# EAGLE board AMP 1.0 BOARD2 (EAGLE 6.5.0)
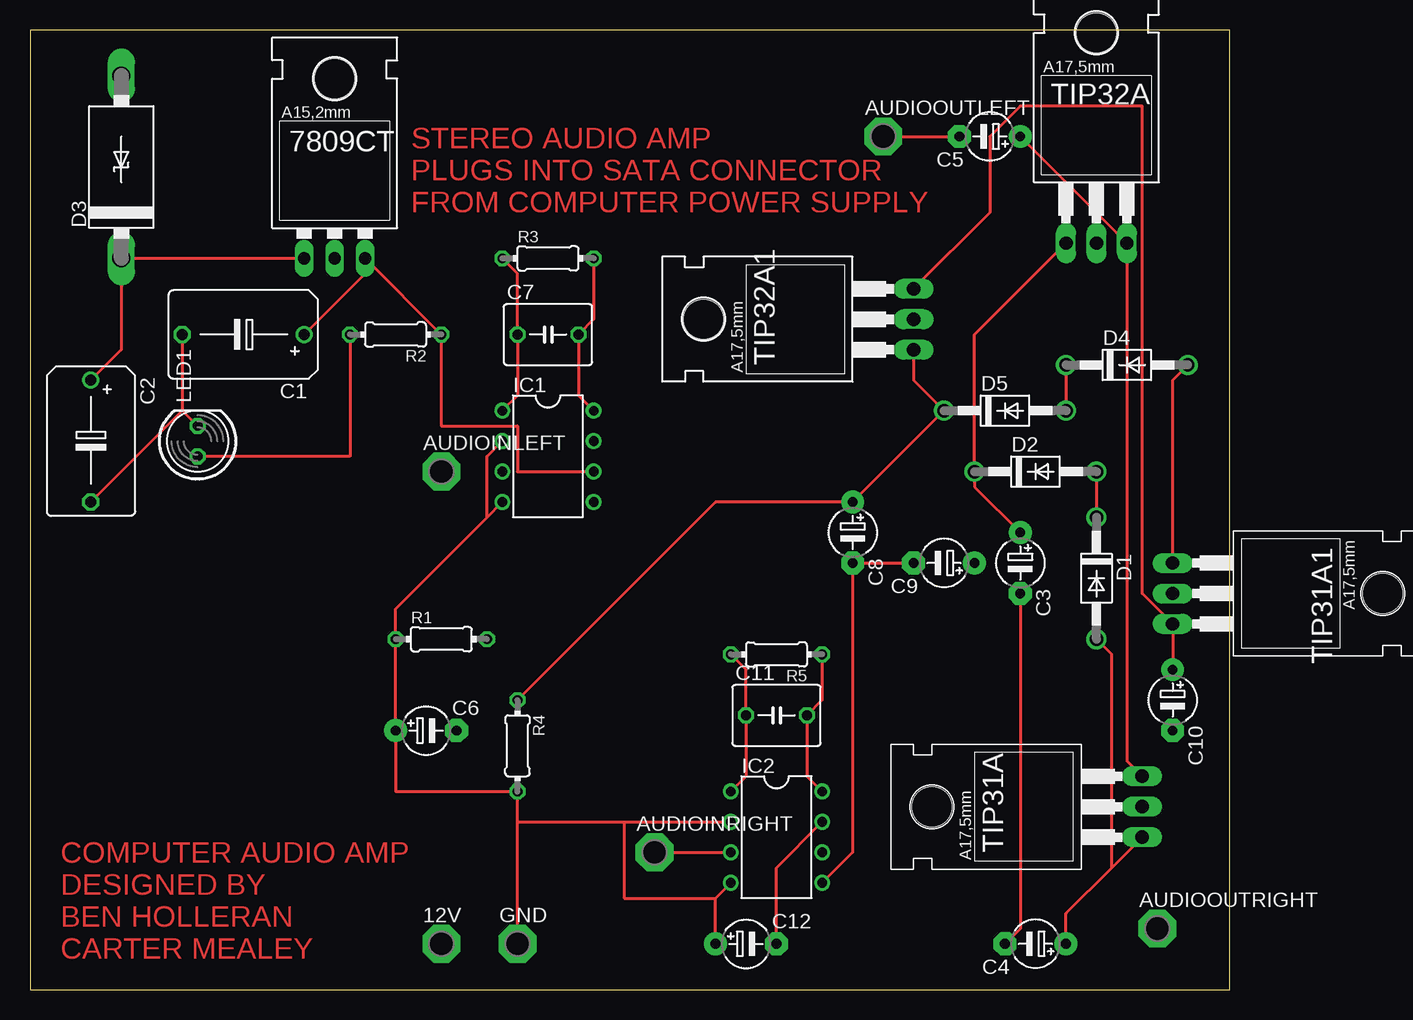
[diagram p0: board, top side]
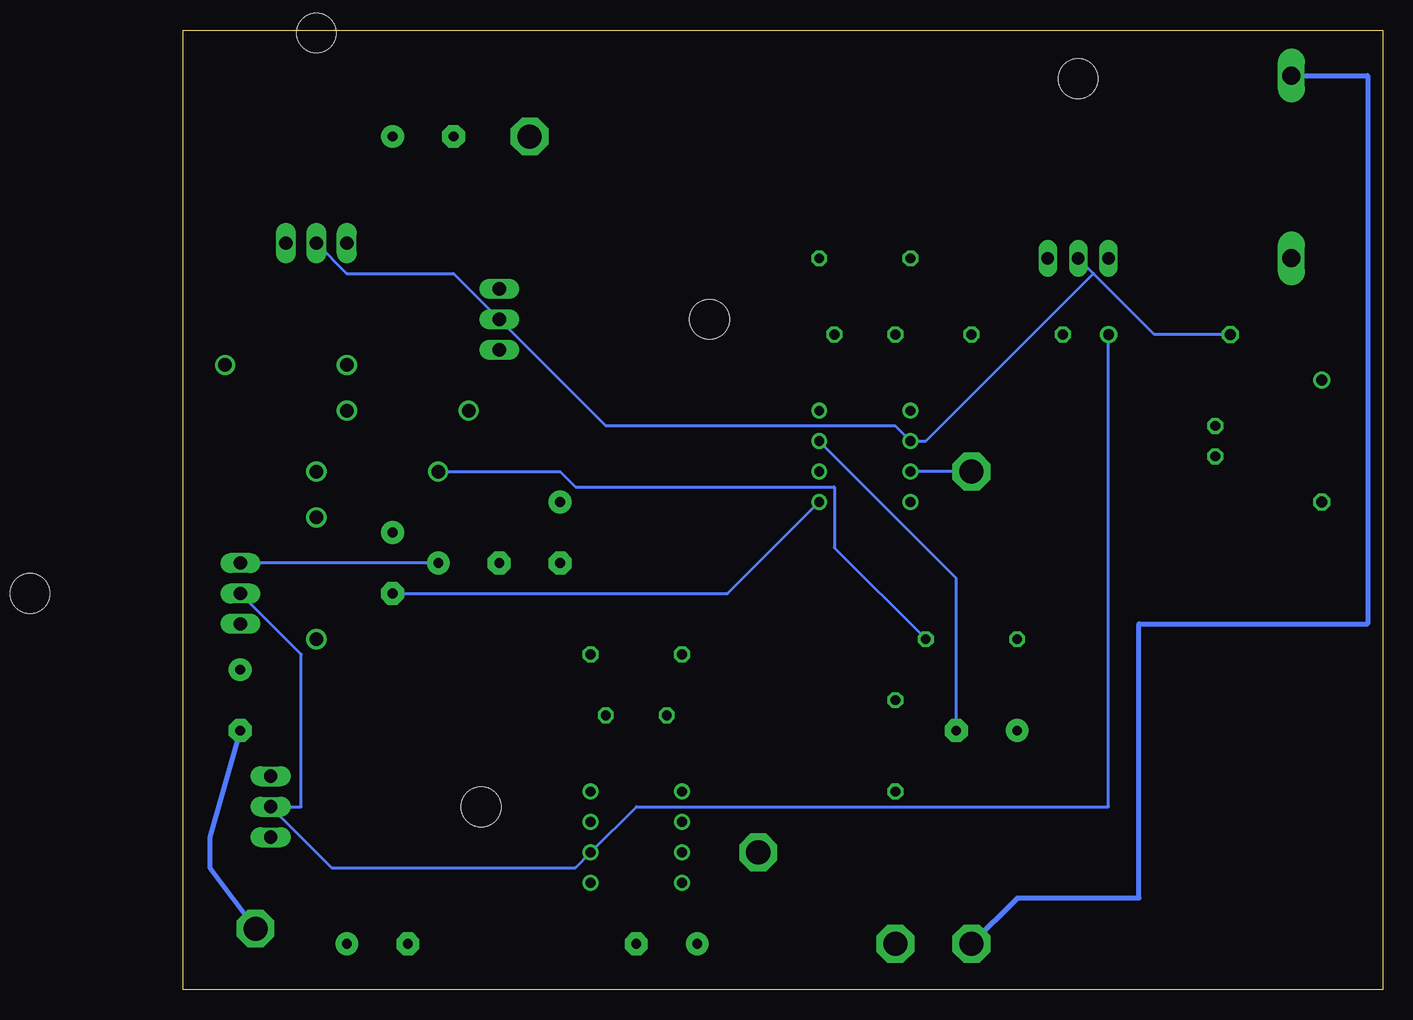
[diagram p1: board, bottom side, seen from below]

Size 100 x 80 mm. Coordinates in mm from the lower left corner, seen from the top.
Outline: 0,0 100,0 100,80 0,80 0,0
Copper layers (1*16): Top 0.035mm / dielectric 1.5mm / Bottom 0.035mm
Design rules "default": minimum track width 10mil, minimum drill 24mil, track to track 8mil, track to pad 8mil, pad to pad 8mil, via to via 8mil, smd to smd 8mil, copper to edge 40mil, drill to drill 8mil, minimum pad ring 10mil, minimum via ring 8mil, stop-mask expansion 4mil, vias tented up to drill 0mil, thermal gap 10mil

## Footprints (pad centres in the part's own frame; a part is rotated, then mirrored left to right if it is on the bottom)
P1-20 = drill 2.007 pad 3.15 octagon: TP 0,0
78XXL = drill 1.016 long: GND 0,-3.81; IN -2.54,-3.81; OUT 2.54,-3.81 | hole 3.302: 0,11.176
B45181C = drill 0.914: + -5.08,0 | drill 0.914 octagon: - 5.08,0
E5-4 = drill 0.813 pad 1.905: + -2.54,0 | drill 0.813 pad 1.905 octagon: - 2.54,0
C050-050X075 = drill 0.813 octagon: 1 -2.54,0; 2 2.54,0
DO41-10 = drill 1.118: A 5.08,0; C -5.08,0
C4111-15 = drill 1.499 long: A 7.62,0; C -7.62,0
DIL08 = drill 0.813 pad 1.27: 1 -3.81,-3.81; 2 -1.27,-3.81; 3 1.27,-3.81; 4 3.81,-3.81; 5 3.81,3.81; 6 1.27,3.81; 7 -1.27,3.81; 8 -3.81,3.81
LED5MM = drill 0.813 octagon: A -1.27,0; K 1.27,0
0204/7 = drill 0.813 octagon: 1 -3.81,0; 2 3.81,0
TO220 = drill 1.118 long: 1 -2.54,-6.35; 2 0,-6.35; 3 2.54,-6.35 | hole 3.302: 0,11.176

## Placement (x,y rotation side)
12V  TPSQPAD1-20  [P1-20]  34.29,3.81 0 top
7809CT  9V out  [78XXL]  25.4,64.77 0 top
AUDIOINLEFT  TPSQPAD1-20  [P1-20]  34.29,43.18 0 top
AUDIOINRIGHT  TPSQPAD1-20  [P1-20]  52.07,11.43 0 top
AUDIOOUTLEFT  TPSQPAD1-20  [P1-20]  71.12,71.12 0 top
AUDIOOUTRIGHT  TPSQPAD1-20  [P1-20]  93.98,5.08 0 top
C1  220uF  [B45181C]  17.78,54.61 180 top
C2  220uF  [B45181C]  5.08,45.72 270 top
C3  47uF  [E5-4]  82.55,35.56 270 top
C4  47uF  [E5-4]  83.82,3.81 180 top
C5  470uF  [E5-4]  80.01,71.12 180 top
C6  6.8Uf  [E5-4]  33.02,21.59 0 top
C7  820pF  [C050-050X075]  43.18,54.61 0 top
C8  47uF  [E5-4]  68.58,38.1 270 top
C9  47uF  [E5-4]  76.2,35.56 180 top
C10  470uF  [E5-4]  95.25,24.13 270 top
C11  820pF  [C050-050X075]  62.23,22.86 0 top
C12  6.8Uf  [E5-4]  59.69,3.81 0 top
D1  1N4004  [DO41-10]  88.9,34.29 270 top
D2  1N4004  [DO41-10]  83.82,43.18 0 top
D3  1N5908  [C4111-15]  7.62,68.58 90 top
D4  1N4004  [DO41-10]  91.44,52.07 0 top
D5  1N4004  [DO41-10]  81.28,48.26 0 top
GND  TPSQPAD1-20  [P1-20]  40.64,3.81 0 top
IC1  LM386N-1  [DIL08]  43.18,44.45 270 top
IC2  LM386N-1  [DIL08]  62.23,12.7 270 top
LED1  [LED5MM]  13.97,45.72 90 top
R1  10K  [0204/7]  34.29,29.21 0 top
R2  1K  [0204/7]  30.48,54.61 180 top
R3  1.1K  [0204/7]  43.18,60.96 0 top
R4  10K  [0204/7]  40.64,20.32 270 top
R5  1.1K  [0204/7]  62.23,27.94 180 top
TIP31A  TIP31C  [TO220]  86.36,15.24 90 top
TIP31A1  TIP31C  [TO220]  101.6,33.02 270 top
TIP32A  TIP30  [TO220]  88.9,68.58 0 top
TIP32A1  TIP30  [TO220]  67.31,55.88 90 top

## Library data of the parts
12V AUDIOINLEFT AUDIOINRIGHT AUDIOOUTLEFT AUDIOOUTRIGHT GND = testpad
7809CT = v-reg
C1-C12 R1-R5 = rcl
D1-D5 = diode
IC1 IC2 = linear
LED1 = led
TIP31A TIP31A1 = transistor-npn
TIP32A TIP32A1 = transistor-pnp

## Nets
N$1: D1.C D2.A
N$2: C3.+ D2.C R1.2 TIP32A.1
N$3: C4.+ D1.A TIP31A.1
N$4: C5.+ TIP31A.3 TIP32A.3
N$5: AUDIOOUTLEFT.TP C5.-
N$6: 7809CT.IN C2.+ D3.C
N$7: AUDIOINLEFT.TP IC1.3
N$8: 7809CT.OUT C1.+ IC1.6 IC2.6 R2.1 TIP31A1.2 TIP31A.2
N$9: C3.- C4.- IC1.5
N$10: LED1.A R2.2
N$11: 12V.TP D3.A
N$12: C6.- IC1.7
N$13: C7.2 IC1.8 R3.2
N$14: AUDIOINRIGHT.TP IC2.3
N$15: C7.1 IC1.1 R3.1
N$16: C10.+ TIP31A1.3 TIP32A1.3
N$17: C8.+ D5.C R4.1 TIP32A1.1
N$18: C9.+ D4.A TIP31A1.1
N$19: D4.C D5.A
N$20: AUDIOOUTRIGHT.TP C10.-
N$21: C8.- C9.- IC2.5
N$23: 7809CT.GND C1.- C2.- C6.+ C12.+ GND.TP IC1.2 IC1.4 IC2.2 IC2.4 LED1.K R1.1 R4.2 TIP32A1.2 TIP32A.2
N$25: C11.2 IC2.8 R5.1
N$26: C11.1 IC2.1 R5.2
N$27: C12.- IC2.7

## Tracks (layer width: path | path; a pad name or v marks a point on that pad's centre or on a via)
N$1
  Top 0.254: D2.A D1.C
N$2
  Top 0.254: TIP32A.1 78.74,54.61 D2.C 78.74,41.91 C3.+
  Bottom 0.254: R1.2 45.72,36.83 45.72,41.91 67.31,41.91 68.58,43.18 D2.C
N$3
  Top 0.254: 90.17,10.16 86.36,6.35 C4.+ | 90.17,10.16 TIP31A.1 | D1.A 90.17,27.94 90.17,10.16
N$4
  Top 0.254: TIP31A.3 91.44,19.05 TIP32A.3 C5.+
N$5
  Top 0.254: AUDIOOUTLEFT.TP C5.-
N$6
  Top 0.254: C2.+ 7.62,53.34 D3.C 7809CT.IN
N$7
  Bottom 0.254: AUDIOINLEFT.TP IC1.3
N$8
  Top 0.254: IC1.6 40.64,43.18 40.64,46.99 34.29,46.99 R2.1 7809CT.OUT 27.94,59.69 C1.+
  Bottom 0.254: TIP31A1.2 90.17,27.94 90.17,15.24 TIP31A.2 87.63,10.16 67.31,10.16 IC2.6 62.23,15.24 22.86,15.24 C1.+
N$9
  Top 0.254: C4.- 82.55,5.08 C3.-
  Bottom 0.254: IC1.5 54.61,33.02 C3.-
N$10
  Top 0.254: LED1.A 26.67,44.45 R2.2
N$11
  Bottom 0.406: D3.A 1.27,76.2 1.27,30.48 20.32,30.48 20.32,7.62 30.48,7.62 12V.TP
N$12
  Bottom 0.254: IC1.7 35.56,34.29 C6.-
N$13
  Top 0.254: R3.2 46.99,55.88 C7.2 45.72,49.53 IC1.8
N$14
  Top 0.254: AUDIOINRIGHT.TP IC2.3
N$15
  Top 0.254: IC1.1 40.64,49.53 C7.1 40.64,59.69 R3.1
N$16
  Top 0.254: TIP32A1.3 80.01,64.77 80.01,71.12 82.55,73.66 92.71,73.66 92.71,33.02 TIP31A1.3 C10.+
  Bottom 0.406: 96.52,30.48 TIP31A1.3
N$17
  Top 0.254: TIP32A1.1 73.66,50.8 D5.C C8.+ 57.15,40.64 R4.1
N$18
  Top 0.254: D4.A 95.25,50.8 TIP31A1.1
  Bottom 0.254: C9.+ TIP31A1.1
N$19
  Top 0.254: D4.C D5.A
N$20
  Bottom 0.406: C10.- 97.79,12.7 97.79,10.16 AUDIOOUTRIGHT.TP
N$21
  Top 0.254: IC2.5 68.58,11.43 C8.- C9.-
N$23
  Top 0.254: 12.7,48.26 LED1.K | C1.- 12.7,48.26 | 12.7,48.26 C2.- | 57.15,7.62 IC2.4 | C12.+ 57.15,7.62 | GND.TP 40.64,13.97 | 40.64,13.97 R4.2 30.48,16.51 C6.+ R1.1 30.48,31.75 38.1,39.37 | 40.64,13.97 49.53,13.97 | 49.53,13.97 IC2.2 | 57.15,7.62 49.53,7.62 49.53,13.97 | 38.1,39.37 IC1.4 | IC1.2 38.1,44.45 38.1,39.37
  Bottom 0.254: 24.13,59.69 19.05,54.61 C1.- | 24.13,59.69 7809CT.GND | TIP32A.2 86.36,59.69 77.47,59.69 TIP32A1.2 64.77,46.99 40.64,46.99 IC1.2 38.1,45.72 24.13,59.69
N$25
  Top 0.254: R5.1 66.04,24.13 C11.2 64.77,17.78 IC2.8
N$26
  Top 0.254: IC2.1 59.69,17.78 C11.1 59.69,26.67 R5.2
N$27
  Top 0.254: IC2.7 62.23,10.16 C12.-

## Text on the board
Top: STEREO AUDIO AMP / PLUGS INTO SATA CONNECTOR / FROM COMPUTER POWER SUPPLY | COMPUTER AUDIO AMP / DESIGNED BY / BEN HOLLERAN / CARTER MEALEY